# Altium PCB StrongPCB_v1.PcbDoc
Units mm, origin at the board's own origin, x right, y up, seen from the top; angles counter-clockwise.
Board outline 72.2 x 80 mm, 2 copper layers (Top Layer, Bottom Layer); 77 components, 52 nets, 371 pads, 27 vias.
Unrouted connection lines stored in the file: 130.
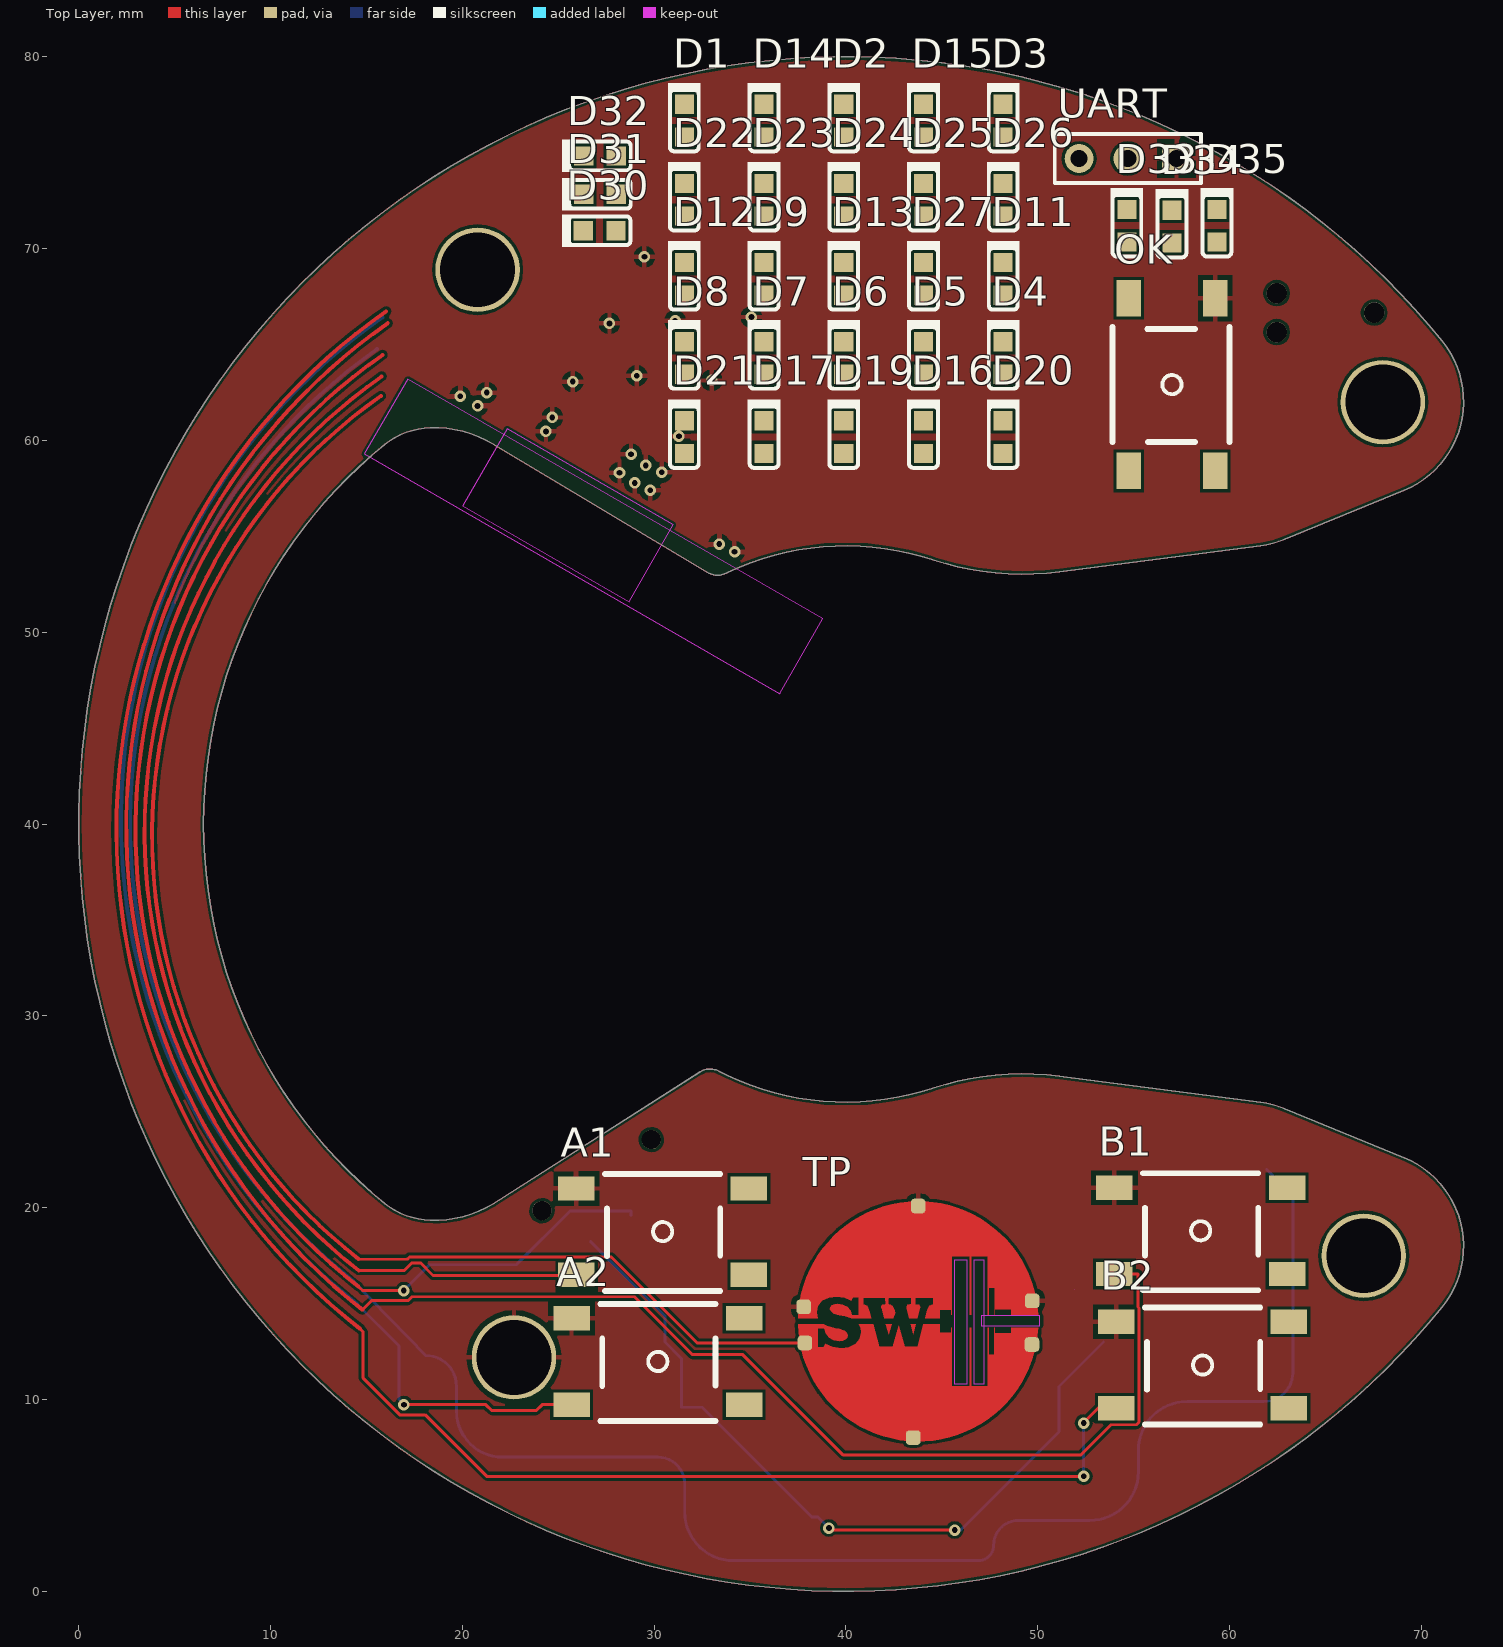
[diagram p0: Top Layer view]
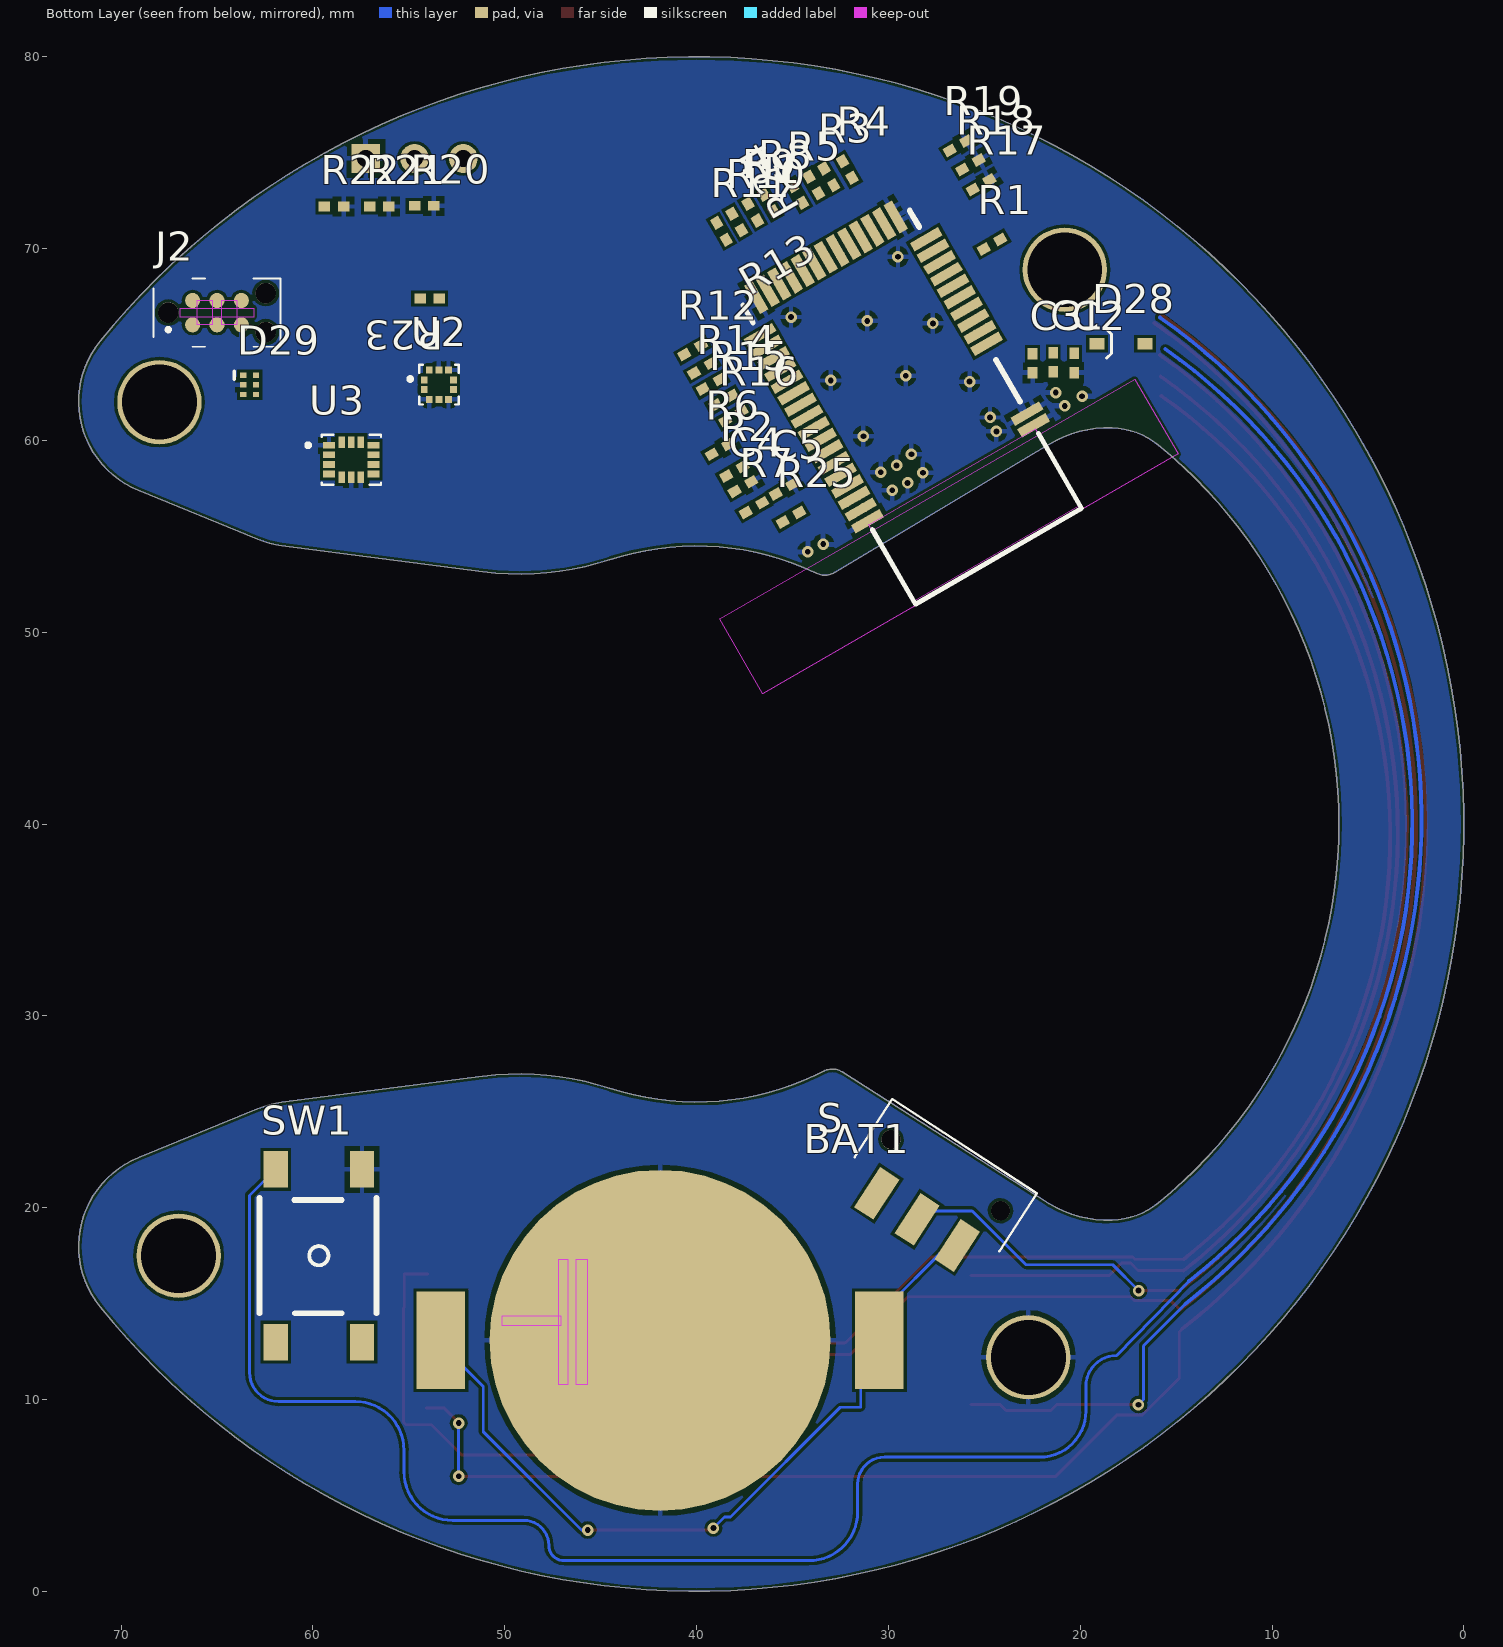
[diagram p1: Bottom Layer view, seen from below]

## Layer stack, top to bottom
Top Solder: solder mask 0.0102, Solder Resist, Dk 3.5
Top Layer: signal copper 0.0356
Dielectric 1: dielectric 0.32, FR-4, Dk 4.8
Bottom Layer: signal copper 0.0356
Bottom Solder: solder mask 0.0102, Solder Resist, Dk 3.5

## Board outline
18.342,19.348 ccw(c18.524,25.345) 21.607,20.198 32.409,27.089 cw(c32.923,26.231) 33.381,27.12 33.862,26.873 ccw(c40.006,40.006) 44.531,26.23 cw(c49.212,11.98) 51.139,26.855 61.619,25.498 cw(c60.977,20.54) 62.876,25.165 69.106,22.607 cw(c67.208,17.981) 71.093,14.835 cw(c40.006,40.006) 71.093,65.178 cw(c67.208,62.031) 69.106,57.406 62.876,54.848 cw(c60.977,59.473) 61.619,54.514 51.139,53.157 cw(c49.212,68.033) 44.531,53.782 ccw(c40.006,40.006) 33.862,53.14 33.757,53.086 cw(c33.3,53.975) 32.786,53.118 21.607,59.815 ccw(c18.524,54.668) 18.342,60.665 ccw(c18.463,56.667) 15.948,59.777 ccw(c31.938,40.006) 15.948,20.236 ccw(c18.463,23.346)

## Design rules (kind name [scope] priority, off if disabled: settings)
Clearance Clearance_1 [All] p1: gap=0.152 ignorepadtopadclearanceinfootprint=FALSE except(0: Arc-Hole Track-Hole SMDPad-Hole THPad-Hole Via-Hole Fill-Hole Poly-Hole Region-Hole Text-Hole)
Clearance [All] p2: gap=0.254 ignorepadtopadclearanceinfootprint=FALSE except(0: Arc-Hole Track-Hole SMDPad-Hole THPad-Hole Via-Hole Fill-Hole Poly-Hole Region-Hole Text-Hole)
HoleSize [All] p1: absolutevalues=TRUE maxlimit=6.2 minlimit=0.3 maxpercent=80.000 minpercent=20.000
MinimumAnnularRing [All] p1: minimumring=0.152
PolygonConnect [All] p1: connectstyle=Relief reliefconductorwidth=0.254 reliefentries=4 polygonreliefangle="90 Angle" airgapwidth=0.254
RoomDefinition StrongPCB_mixed [InComponentClass('StrongPCB_mixed')] p1: confinementstyle=ConfineIn formatcopy=TRUE lockcomponents=FALSE outline 74,2 203,2 203,32 74,32
RoutingCorners [All] p1: cornerstyle=45-Degree minsetback=0.152 maxsetback=0.152
RoutingVias [All] p1: holewidth=0.3 width=0.6 viastyle="Through Hole" minholewidth=0.3 minwidth=0.6 maxholewidth=0.3 maxwidth=0.6
SMDNeckDown [All] p1: percent=90.000
SolderMaskExpansion [All] p1: expansion=0.102
UnRoutedNet [All] p1: checkbadconnections=TRUE
Width [All] p1: maxlimit=0.254 minlimit=0.152 preferedwidth=0.153 minimp=50.000000 maximp=50.000000 favimp=50.000000
27 further rules are at their usual default settings.

## Classes and differential pairs
net class ROW[1..3]: ROW1 ROW2 ROW3
net class COL[1..9]: COL1 COL2 COL3 COL4 COL5 COL6 COL7 COL8 COL9

## Components (designator, comment, footprint, x,y, rotation, side; value= is the part's Value field where it differs from the comment)
A1 "SW_SPST_6MM" SW_FSM4JSMA#1 30.45,18.756 r90 top
A2 "SW_SPST_6MM" SW_FSM4JSMA#2 30.2,11.986 r90 top
B1 "SW_SPST_6MM" SW_FSM4JSMA#1 58.5,18.8 r90 top
B2 "SW_SPST_6MM" SW_FSM4JSMA#2 58.6,11.8 r90 top
BAT1 "BAT-HLD-001" BAT-HLD-001 41.9,13.089 r180 bottom
C1 "CAP_4U7_6V3_X5R_20%_0402" c_0402 21.406,64.077 r180 bottom
C2 "AP_4U7_6V3_X5R_20%_0402" c_0402 20.3,64.043 r180 bottom
C3 "1U_6V3" C_0402 22.486,64.033 r180 bottom
C4 "1U_6V3" C_0402 37.588,57.6 r60 bottom
C5 "CAP_100N_25V_0402_10%_X5R" C_0402 35.432,57.466 r60 bottom
D1 "LED_0603_RED" LED_0603_RED 31.581,76.675 r0 top
D2 "LED_0603_RED" LED_0603_RED 39.891,76.675 r0 top
D3 "LED_0603_RED" LED_0603_RED 48.2,76.675 r0 top
D4 "LED_0603_RED" LED_0603_RED 48.2,64.3 r0 top
D5 "LED_0603_RED" LED_0603_RED 44.045,64.3 r0 top
D6 "LED_0603_RED" LED_0603_RED 39.891,64.3 r0 top
D7 "LED_0603_RED" LED_0603_RED 35.736,64.3 r0 top
D8 "LED_0603_RED" LED_0603_RED 31.581,64.3 r0 top
D9 "LED_0603_RED" LED_0603_RED 35.736,68.425 r0 top
D11 "LED_0603_RED" LED_0603_RED 48.2,68.425 r0 top
D12 "LED_0603_RED" LED_0603_RED 31.581,68.425 r0 top
D13 "LED_0603_RED" LED_0603_RED 39.891,68.425 r0 top
D14 "LED_0603_RED" LED_0603_RED 35.736,76.675 r0 top
D15 "LED_0603_RED" LED_0603_RED 44.045,76.675 r0 top
D16 "LED_0603_RED" LED_0603_RED 44.045,60.175 r0 top
D17 "LED_0603_RED" LED_0603_RED 35.736,60.175 r0 top
D19 "LED_0603_RED" LED_0603_RED 39.891,60.175 r0 top
D20 "LED_0603_RED" LED_0603_RED 48.2,60.175 r0 top
D21 "LED_0603_RED" LED_0603_RED 31.581,60.175 r0 top
D22 "LED_0603_RED" LED_0603_RED 31.581,72.55 r0 top
D23 "LED_0603_RED" LED_0603_RED 35.736,72.55 r0 top
D24 "LED_0603_RED" LED_0603_RED 39.891,72.55 r0 top
D25 "LED_0603_RED" LED_0603_RED 44.045,72.55 r0 top
D26 "LED_0603_RED" LED_0603_RED 48.2,72.55 r0 top
D27 "LED_0603_RED" LED_0603_RED 44.045,68.425 r0 top
D28 "D_BAT43WS-7-F" SOD323 17.872,65.04 r90 bottom
D29 "D_ESD_PRTR5V0U2F_115" SOT886 63.3,62.905 r180 bottom
D30 "LED_0603_RED_100KG" LED_0603_RED 27.163,70.935 r90 top
D31 "LED_0603_RED_200KG" LED_0603_RED 27.183,72.835 r90 top
D32 "LED_0603_RED_300KG" LED_0603_RED 27.183,74.835 r90 top
D33 "LED_0603_RED_ID" LED_0603_RED 54.652,71.198 r0 top
D34 "LED_0603_RED_KG" LED_0603_RED 57,71.15 r0 top
D35 "LED_0603_RED_RPS" LED_0603_RED 59.348,71.198 r0 top
J2 "Sockets & Adapters J-Link 6-pin Needle Adapter   Source:  Datasheet" "J-Link 6-pin Needle Adapter no legs" 67.54,66.665 r180 bottom
OK "SW_SPST_6MM" SW_FSM4JSMA#2 57,62.913 r0 top
R1 "R_1K_0402_5%" R_0402 24.6,70.236 r240 bottom
R2 "R_1K_0402_5%" R_0402 38.021,58.4 r60 bottom
R3 "R_1K_0402_5%" R_0402 33.1,73.746 r150 bottom
R4 "R_1K_0402_5%" R_0402 32.137,74.121 r150 bottom
R5 "R_10M_0402_5%" R_0402 34.736,72.831 r150 bottom
R6 "R_12K_0402_1%" R_0402 38.777,59.533 r60 bottom
R7 "R_10K_0402_5%" R_0402 37,56.502 r60 bottom
R8 "R_220R_0402_1%" R_0402 36.232,72.377 r150 bottom
R9 "R_220R_0402_1%" R_0402 37.076,71.9 r150 bottom
R10 "R_220R_0402_1%" R_0402 37.9,71.396 r150 bottom
R11 "R_220R_0402_1%" R_0402 38.7,70.908 r150 bottom
R12 "R_220R_0402_1%" R_0402 40.2,64.724 r60 bottom
R13 "R_220R_0402_1%" R_0402 39.7,63.776 r60 bottom
R14 "R_220R_0402_1%" R_0402 39.233,62.925 r60 bottom
R15 "R_220R_0402_1%" R_0402 38.6,62.1 r60 bottom
R16 "R_220R_0402_1%" R_0402 38.069,61.276 r60 bottom
R17 "R_220R_0402_1%" R_0402 25.162,73.337 r240 bottom
R18 "R_220R_0402_1%" R_0402 25.711,74.371 r240 bottom
R19 "R_220R_0402_1%" R_0402 26.372,75.371 r240 bottom
R20 "R_220R_0402_1%" R_0402 54.2,72.229 r270 bottom
R21 "R_220R_0402_1%" R_0402 56.539,72.2 r270 bottom
R22 "R_220R_0402_1%" R_0402 58.9,72.2 r270 bottom
R23 "R_1K_0402_5%" R_0402 53.912,67.4 r270 bottom
R24 "R_1K_0402_5%" R_0402 33.887,73.313 r150 bottom
R25 "R_1K_0402_5%" R_0402 35.076,56 r60 bottom
S "JS102011SAQN" SW_JS102011SAQN 27.008,21.7 r33 bottom
SW1 "SW_SPST_6MM" SW_FSM4JSMA#3 59.693,17.5 r180 bottom
TP "Component_1" PCBComponent_1 35.895,7.888 r0 top
U1 "IC_nRF51822_MODULE" IC_nRF51822_MODULE_PASTE 29,62.6 r330 bottom
U2 "BMP388" PQFN50P200X200X80-10N 53.43,62.907 r180 bottom
U3 "LSM6DSLTR" PQFN50P300X250X86-14N 58,59 r180 bottom
UART "Header 3" HDR1X3 57.24,74.7 r180 top

## Footprints (in the part's own frame and the unit in brackets; to place one, negate y for a bottom-side part, rotate by r counter-clockwise, add the part's x,y. Pads: shape width x height; smd on the part's side, far side on the other; paste and mask are expansions set on the pad)
BAT-HLD-001 [mil]
  rect 100x200 smd: +@1(-450,0) +@2(450,0)
  round 700 smd: NEG(0,0)
c_0402 [mm]
  rect 0.5x0.6 smd: 1(0,0.5) 2(0,-0.5)
  body extent -0.26,-0.5 0.27,0.5, height 0.36
C_0402 [mm]
  rect 0.5x0.6 smd: 1(0,0.5) 2(0,-0.5)
  body extent -0.26,-0.5 0.27,0.5, height 0.36
HDR1X3 [mm] "Connector; Header; 3 Position"
  rect 1.5x1.5 hole 0.9: 1(0,0)
  round 1.5 hole 0.9: 2(2.54,0) 3(5.08,0)
  silkscreen extent -1.27,-1.27 6.35,1.27
IC_nRF51822_MODULE_PASTE [mm]
  round 0.5 smd: 1(-5.291,4.849) 1(-4.591,4.849) 2(-5.291,4.149) 2(-4.591,4.149) 3(-5.291,-0.051) 3(-4.591,-0.051) 4(-5.291,-0.751) 4(-4.591,-0.751) 5(-5.291,-1.451) 5(-4.591,-1.451) 6(-5.291,-2.151) 6(-4.591,-2.151) 7(-5.291,-2.851) 7(-4.591,-2.851) 8(-5.291,-3.551) 8(-4.591,-3.551) 9(-5.291,-4.251) 9(-4.591,-4.251) 10(-5.291,-4.951) 10(-4.591,-4.951) 11(-5.291,-5.651) 11(-4.591,-5.651) 12(-5.291,-6.351) 12(-4.591,-6.351) 13(-3.991,-8.651) 13(-3.991,-7.851) 14(-3.291,-8.651) 14(-3.291,-7.851) 15(-2.591,-8.651) 15(-2.591,-7.851) 16(-1.891,-8.651) 16(-1.891,-7.851) 17(-1.191,-8.651) 17(-1.191,-7.851) 18(-0.491,-8.651) 18(-0.491,-7.851) 19(0.209,-8.651) 19(0.209,-7.851) 20(0.909,-8.651) 20(0.909,-7.851) 21(1.609,-8.651) 21(1.609,-7.851) 22(2.309,-8.651) 22(2.309,-7.851) 23(3.009,-8.651) 23(3.009,-7.851) 24(3.709,-8.651) 24(3.709,-7.851) 25(4.409,-8.651) 25(4.409,-7.851) 26(5.009,-6.351) 26(5.709,-6.351) 27(5.009,-5.651) 27(5.709,-5.651) 28(5.009,-4.951) 28(5.709,-4.951) 29(5.009,-4.251) 29(5.709,-4.251) 30(5.009,-3.551) 30(5.709,-3.551) 31(5.009,-2.851) 31(5.709,-2.851) 32(5.009,-2.151) 32(5.709,-2.151) 33(5.009,-1.451) 33(5.709,-1.451) 34(5.009,-0.751) 34(5.709,-0.751) 35(5.009,-0.051) 35(5.709,-0.051) 36(5.009,0.649) 36(5.709,0.649) 37(5.009,1.349) 37(5.709,1.349) 38(5.009,2.049) 38(5.709,2.049) 39(5.009,2.749) 39(5.709,2.749) 40(5.009,3.449) 40(5.709,3.449) 41(5.009,4.149) 41(5.709,4.149) 42(5.009,4.849) 42(5.709,4.849)
  rect 1.7x0.5 smd: 1(-4.791,4.849) 2(-4.791,4.149) 3(-4.791,-0.051) 4(-4.791,-0.751) 5(-4.791,-1.451) 6(-4.791,-2.151) 7(-4.791,-2.851) 8(-4.791,-3.551) 9(-4.791,-4.251) 10(-4.791,-4.951) 11(-4.791,-5.651) 12(-4.791,-6.351) 26(5.209,-6.351) 27(5.209,-5.651) 28(5.209,-4.951) 29(5.209,-4.251) 30(5.209,-3.551) 31(5.209,-2.851) 32(5.209,-2.151) 33(5.209,-1.451) 34(5.209,-0.751) 35(5.209,-0.051) 36(5.209,0.649) 37(5.209,1.349) 38(5.209,2.049) 39(5.209,2.749) 40(5.209,3.449) 41(5.209,4.149) 42(5.209,4.849)
  rect 0.5x1.7 smd: 13(-3.991,-8.151) 14(-3.291,-8.151) 15(-2.591,-8.151) 16(-1.891,-8.151) 17(-1.191,-8.151) 18(-0.491,-8.151) 19(0.209,-8.151) 20(0.909,-8.151) 21(1.609,-8.151) 22(2.309,-8.151) 23(3.009,-8.151) 24(3.709,-8.151) 25(4.409,-8.151)
  silkscreen extent -4.79,-8.15 5.21,9.85, body extent -4.89,-8.18 5.11,9.82, height 3.2
"J-Link 6-pin Needle Adapter no legs" [mil]
  rrect100% 30.98x30.98 smd: 1(50,-25) 2(50,25) 3(100,-25) 4(100,25) 5(150,-25) 6(150,25)
  round 42.01 hole 42.01 unplated: MH5(0,0) MH6(200,40) MH7(200,-40)
  Top Layer keep-out region: 109.5,25 140.5,25 140.5,-25 109.5,-25
  Top Layer keep-out region: 59.5,25 90.5,25 90.5,-25 59.5,-25
  Top Layer keep-out region: 25,9.5 175,9.5 175,-9.5 25,-9.5
  silkscreen extent -30,-70 230,70
LED_0603_RED [mm]
  round 0.152 on Top Overlay: 0(0,0)
  rect 1x1 smd paste+0 mask+0: A(0,-0.85) K(0,0.85)
  silkscreen extent -0.85,-1.6 0.85,1.97, body extent -0.43,-0.84 0.37,0.78, height 1.1
PCBComponent_1 [mil]
  rrect50% 30x30 smd: 1(75,273.57) 1(310,480.46) 1(544.09,285.65) 2(77.61,199.31) 2(300,5.02) 2(543.7,196.19)
  Top Layer region: 103.81,190.41 115.85,190.42 119.83,197.68 134.19,191.2 151.96,188.78 167.8,190.63 182.08,197.58 190.5,208.05 193.19,221.23 192.03,230.11 188.15,237.92 217.72,237.92 230.49,191.82 258.12,191.84 270.26,234.2 282.19,191.86 308.73,191.88 320.86,237.92 354.84,237.92 354.84,220.21 377.46,220.21 377.46,230.75 379.39,230.75 379.39,110.96 416,110.96 416,230.75 419.48,230.75 419.48,110.96 452.62,110.96 452.62,230.75 454.71,230.75 454.71,174.93 466.52,174.93 466.52,230.75 467.31,230.75 467.31,219.01 501.05,219.01 501.05,230.75 556.44,230.75 518.61,112 427.55,26.9 306.51,-2.83 186.39,30.4 97.85,118.12 63.49,237.92 63.49,237.92 116.24,237.92 122.16,235.09 143.73,229.02 148.16,228.01 159.45,224.42 163.31,220.53 166.01,215.26 164.78,210.27 161.23,206.56 154.88,203.99 148.03,203.35 137.04,205.03 127.36,210.48 120.46,219.06 117.12,229.58 103.78,229.57
  Top Layer region: 158 vertices and 0 holes, not listed, extent 63.76,250 556.16,490.23
  Top Layer region: 299.79,216.96 294.55,237.92 305.29,237.92
  Top Layer region: 243.79,237.92 255.94,237.92 249.47,216.92
  Keep-Out Layer region: 545,235
  Keep-Out Layer region: 560,235 560,255 440,255 440,235
  Keep-Out Layer region: 385,370 410,370 410,115 385,115
  Keep-Out Layer region: 425,370 445,370 445,115 425,115
  Keep-Out Layer region: 630,310
PQFN50P200X200X80-10N [mm]
  rrect9% 0.35x0.38 smd: 1(-0.765,0.25) 2(-0.765,-0.25) 3(-0.5,-0.765) 4(0,-0.765) 5(0.5,-0.765) 6(0.765,-0.25) 7(0.765,0.25) 8(0.5,0.765) 9(0,0.765) 10(-0.5,0.765)
  silkscreen extent -1.6,-1.03 1.03,1.03
PQFN50P300X250X86-14N [mm]
  rect 0.61x0.35 smd: 1(-1.16,0.75) 2(-1.16,0.25) 3(-1.16,-0.25) 4(-1.16,-0.75) 8(1.16,-0.75) 9(1.16,-0.25) 10(1.16,0.25) 11(1.16,0.75)
  rect 0.35x0.61 smd: 5(-0.5,-0.91) 6(0,-0.91) 7(0.5,-0.91) 12(0.5,0.91) 13(0,0.91) 14(-0.5,0.91)
  silkscreen extent -2.35,-1.3 1.55,1.3
R_0402 [mm]
  rect 0.5x0.6 smd: 1(0,0.5) 2(0,-0.5)
  body extent -0.25,-0.47 0.25,0.53, height 0.35
SOD323 [mm]
  rect 0.6x0.8 smd: 1(0,1.25) 2(0,-1.25)
  silkscreen extent -0.75,0.5 0.75,0.75, body extent -0.68,-1.3 0.67,1.3, height 1.1
SOT886 [mm]
  rect 0.325x0.27 smd: 1(-0.338,0.5) 2(-0.338,0) 3(-0.338,-0.5) 4(0.338,-0.5) 5(0.338,0) 6(0.338,0.5)
  silkscreen extent -0.8,0.3 -0.8,0.7, body extent -0.5,-0.75 0.5,0.75, height 0.82
SW_FSM4JSMA#1 [mm]
  rect 1.27x1.905 smd: 1(-2.25,4.5) 2(2.25,4.5) 3(2.25,-4.5) 4(-2.25,-4.5)
  round 0.152 on Top Overlay: 3(0,0)
  silkscreen extent -3.1,-3 3,3, body extent -3,-5 3,5, height 5.1
SW_FSM4JSMA#2 [mm]
  rect 1.27x1.905 smd: 1(-2.25,4.5) 2(2.25,4.5) 3(2.25,-4.5) 4(-2.25,-4.5)
  round 0.152 on Top Overlay: 3_1(0,0)
  silkscreen extent -3.1,-3 3,3, body extent -3,-5 3,5, height 5.1
SW_FSM4JSMA#3 [mm]
  rect 1.27x1.905 smd: 1(-2.25,4.5) 2(2.25,4.5) 3(2.25,-4.5) 4(-2.25,-4.5)
  round 0.152 on Bottom Overlay: 3(0,0)
  silkscreen extent -3.1,-3 3,3, body extent -3,-5 3,5, height 5.1
SW_JS102011SAQN [mm]
  rect 1.2x2.5 smd: 1(-2.5,2.75) 2(0,2.75) 3(2.5,2.75)
  round 1 hole 1 unplated: ""(-3.4,0) ""(3.4,0)
  silkscreen extent -4.5,-1.8 4.5,1.8

## Part data
A1 A2 B1 B2 OK SW1: "SPST SWITCH 6MM", MANUFACTURER="TE CONNECTIVITY / ALCOSWITCH", FARNELL=3801305, PART=FSM4JSMA
BAT1: "Battery Retainer Coin, 20.0mm 1 Cell SMD _SMT_ Tab", Package=None, Digi-Key_Part_Number=BAT-HLD-001-TRCT-ND, Digi-Key_Purchase_URL=https://www.digikey.com/product-detail/en/linx-technologies-inc/BAT-HLD-001-TR/BAT-HLD-001-TRCT-ND/5803803?utm_source=snapeda&utm_medium=aggregator&utm_campaign=symbol, MF="Linx Technologies", MP=BAT-HLD-001, SnapEDA_Link=https://www.snapeda.com/parts/BAT-HLD-001/Linx%20Technologies%20Inc./view-part/184402/?ref=snap
C1: MANUFACTURER=TDK, FARNELL=1962109, PART=C1005X5R0J475M
C2: library part CAP_4U7_6V3_X5R_20%_0402, "CAP_4U7_6V3_X5R_20%_0402", MANUFACTURER=TDK, FARNELL=1962109, PART=C1005X5R0J475M
C3 C4: library part CAP_1u_6V3_0402_10%_X6S, "CAP_1u_6V3_0402_10%_X6S", MANUFACTURER=YAGEO, DIGIKEY=311-1338-6-ND, FARNELL=9402047RL, MOUSER=603-CC402KRX7R7BB104, PART=CC0402KRX7R7BB104
C5: MANUFACTURER="TAIYO YUDEN", FARNELL=1611916, PART=TMK105BJ104KV-F
D1 D2 D3 D4 D5 D6 D7 D8 D9 D11 D12 D13 D14 D15 D16 D17 D19 D20 D21 D22 D23 D24 D25 D26 D27: "LED RED 0603", MANUFACTURER=KINGBRIGHT, FARNELL=8529868RL, PART=KP-1608SURC
D28: "Schottky 200mA 30V 0.5uA@25Vr", MANUFACTURER="Diodes Incorporated", DIGIKEY=BAT43WS-FDICT-ND, FARNELL=2305998, MOUSER=621-BAT43WS-F, PART=BAT43WS-7-F, RS=751-3364P
D29: "Ultra low capacitance double rail-to-rail ESD protection", MANUFACTURER=NXP, FARNELL=2459738, PART=PRTR5V0U2F_115
D30 D31 D32 D33 D34 D35: library part LED_0603_RED, "LED RED 0603", MANUFACTURER=KINGBRIGHT, FARNELL=8529868RL, PART=KP-1608SURC
J2: library part "J-Link Connector", Manufacturer_Name="Segger Microcontroller", Manufacturer_Part_Number=8.06.16, Package=80616, DeviceSetName=8.06.16, GateName_1=G$1, Height=1mm, LibraryName=8.06.16, Mouser_Part_Number=943-8.06.16, Mouser_Price-Stock=https://www.mouser.com/Search/Refine.aspx?Keyword=943-8.06.16, SymbolName_1=8.06.16
R5: MANUFACTURER=YAGEO, FARNELL=9238964RL, PART=RC0603FR-0710ML
S: "Slide Switch SPDT Surface Mount, Right Angle", Package=None, Availability=Unavailable, MF=C&K, MP=JS102011SAQN, Price=None, SnapEDA_Link=https://www.snapeda.com/parts/JS102011SAQN/C%26K/view-part/214325/?ref=snap
U1: "RF System on a Chip - SoC 2.4GHz BT low Energy 256KB Flash 16KB Ram", MANUFACTURER=RAYTAC, FARNELL=???, PART=MDBT40-256V3
U2: "Pressure Sensor 4.35PSI ~ 18.13PSI _30kPa ~ 125kPa_ Absolute 10-WFLGA", Package="WFLGA-10 Bosch Tools", Digi-Key_Part_Number=828-1079-1-ND, Digi-Key_Purchase_URL=https://www.digikey.com/product-detail/en/bosch-sensortec/BMP388/828-1079-1-ND/8322640?utm_source=snapeda&utm_medium=aggregator&utm_campaign=symbol, MF="Bosch Sensortec", MP=BMP388, SnapEDA_Link=https://www.snapeda.com/parts/BMP388/Bosch%20Sensortec/view-part/2747857/?ref=snap
U3: "Accelerometer, Gyroscope, Temperature, 6 Axis Sensor I²C, SPI Output", Package="LGA-14 STMicroelectronics", Availability=Unavailable, MF=STMicroelectronics, MP=LSM6DSLTR, Price=None, SnapEDA_Link=https://www.snapeda.com/parts/LSM6DSLTR/STMicroelectronics/view-part/550517/?ref=snap
UART: "Header, 3-Pin", LatestRevisionDate=17-Jul-2002, LatestRevisionNote="Re-released for DXP Platform.", Publisher="Altium Limited"
R1 R2 R3 R4 R23 R24 R25: FARNELL=1358043
R6: FARNELL=2447104RL, FARNELL_ROHS=2447104RL
R7: FARNELL=1358069

## Free pads (board coordinates)
  round 4.4 hole 3.9: 3(20.8,68.9) 3(22.7,12.2) 3(67,17.5) 3(68,62)

## Via types
v1: diameter 0.6, hole 0.3, Top Layer to Bottom Layer, tented both sides, 27 vias

## Nets (pads, with @x,y where several pads share a name; then routed paths per layer and width w, separated by ;. In a path a pad name is that pad's centre, name@x,y a point inside that pad or via, vN(x,y) a via of type N, cw(c..) or ccw(c..) an arc to the next point about the centre after c; other vN are vias at no path point)
ACC_INT1: U1.11 U3.4
ACC_INT2: U1.10 U3.9
BTN_A: A1.1 R2.2 U1.37 | length 65.7
  Top Layer w0.153: 14.604,16.728 16.98,16.728 17.381,17.129 17.819,17.129 18.483,16.465 A1.1@25.7,16.465
  Top Layer w0.2: 14.604,16.728 cw(c32.444,39.591) 15.8,63.34
BTN_B: B1.1 R1.2 U1.9 | length 113.6
  Top Layer w0.153: 14.801,14.683 15.274,15.156 17.175,15.156 17.38,15.36 28.981,15.36 32.001,12.341 34.628,12.341 39.868,7.101 52.233,7.101 53.818,8.686 55.147,8.686 55.281,8.82 55.281,14.78 55.237,14.824 55.237,16.55 B1.1
  Top Layer w0.2: 14.801,14.683 cw(c34.487,39.911) 16.121,66.117
COL1: R8.2 U1.21
COL2: R9.2 U1.22
COL3: R10.2 U1.23
COL4: R11.2 U1.24
COL5: R12.2 U1.26
COL6: R13.2 U1.27
COL7: R14.2 U1.28
COL8: R15.2 U1.29
COL9: R16.2 U1.30
COLR1: D1.K D11.K D19.K R8.1
COLR2: D2.K D12.K D20.K R9.1
COLR3: D3.K D13.K D21.K R10.1
COLR4: D4.K D14.K D22.K R11.1
COLR5: D5.K D15.K D23.K R12.1
COLR6: D6.K D16.K D24.K R13.1
COLR7: D7.K D17.K D25.K R14.1
COLR8: D8.K D26.K R15.1
COLR9: D9.K D27.K R16.1
GND: A1.2 A2.2 B1.2 B2.2 BAT1.NEG C1.2 C2.2 C3.2 C4.2 C5.2 D29.2 J2.5 OK.2 pad.3@22.7,12.2 R6.2 R17.1 R18.1 R19.1 R20.1 R21.1 R22.1 SW1.2 TP.1 U1.1 U1.2 U1.13 U1.25 U1.42 U2.3 U2.5 U2.8 U2.9 U3.1 U3.6 U3.7 UART.1
  other v1: 34.197,54.2 33.4,54.6 29.8,57.4 29,57.787 28.2,58.321 30.4,58.34 29.573,58.7 28.8,59.281 31.3,60.218 24.367,60.474 24.7,61.2 20.8,61.804 19.9,62.312 21.273,62.5 25.766,63.071 33,63.129 29.1,63.372 27.677,66.104 31.1,66.235 35.076,66.435 29.5,69.573
MAG_INT1: U1.12 U2.7
MISO: D31.A U1.5
MOSI: D32.A U1.4
NetBAT1_+@1: BAT1.+@1 BAT1.+@2 S.1 | length 40.8
  Top Layer w0.153: v1(39.118,3.3) 39.042,3.3 39.142,3.2 45.674,3.2 v1(45.676,3.198)
  Bottom Layer w0.153: S.1@26.701,18.232 30.57,14.363 30.57,13 31.438,12.132 31.438,9.6 32.505,9.6 38.223,3.882 38.537,3.882 v1(39.118,3.3) ; v1(45.676,3.198) 45.991,3.198 51.119,8.325 51.119,10.689 53.43,13
NetD28_2: D28.2 S.2 | length 72.7
  Top Layer w0.153: 14.6,15.883 14.799,15.684 v1(16.957,15.684)
  Top Layer w0.2: 14.6,15.883 cw(c33.192,39.711) 15.847,64.462
  Bottom Layer w0.153: v1(16.957,15.684) 18.3,17.028 22.823,17.028 25.631,19.836 28.798,19.836 S.2@28.798,19.594
NetD30_K: D30.K R17.2
NetD31_K: D31.K R18.2
NetD32_K: D32.K R19.2
NetD33_K: D33.K R20.2
NetD34_K: D34.K R21.2
NetD35_K: D35.K R22.2
P0: R5.2 TP.2 U1.20 | length 77.5
  Top Layer w0.153: 14.61,17.316 17.137,17.316 17.255,17.434 27.77,17.434 32.253,12.951 TP.2@37.866,12.951 ; TP.2@43.515,7.999 TP.2@43.515,8.016
  Top Layer w0.2: 14.61,17.316 cw(c31.834,39.391) 15.764,62.321
P0.16: D35.A U1.34
P0.18: OK.1 R23.2 U1.38
P0.20: A2.1 R25.2 U1.40 | length 75
  Top Layer w0.153: v1(16.964,9.736) 21.232,9.736 21.548,9.419 23.852,9.419 24.168,9.736 A2.1
  Bottom Layer w0.153: 14.521,14.983 16.7,12.804 16.7,10 v1(16.964,9.736)
  Bottom Layer w0.2: 14.521,14.983 cw(c34.207,40.211) 15.841,66.417
P1: B2.1 D33.A R24.2 U1.19 | length 108.8
  Top Layer w0.153: 14.673,13.694 14.837,13.53 14.837,11.115 16.745,9.207 18.071,9.207 21.278,6 v1(52.4,6) ; v1(52.4,8.774) 52.4,8.8 53.15,9.55 B2.1
  Top Layer w0.2: 14.673,13.694 cw(c34.973,39.711) 16.034,66.736
  Bottom Layer w0.153: v1(52.4,6) v1(52.4,8.774)
P2: D34.A U1.18
ROW1: D1.A D2.A D3.A D4.A D5.A D6.A D7.A D8.A D9.A U1.31
ROW2: D11.A D12.A D13.A D14.A D15.A D16.A D17.A U1.32
ROW3: D19.A D20.A D21.A D22.A D23.A D24.A D25.A D26.A D27.A U1.33
SCK: D30.A U1.6
SCL: R3.2 U1.17 U2.2 U3.13
SDA: R4.2 U1.16 U2.4 U3.14
SWCLK: D29.3 D29.4 J2.4 R6.1 U1.36
SWDIO_RST: D29.1 D29.6 J2.2 J2.3 U1.35
TGT_NRST: C5.1 R7.2 SW1.1 U1.39 | length 131.6
  Bottom Layer w0.153: 14.32,16.183 18.1,12.3 cw(c18.1,10.7) 19.7,10.7 19.7,9.4 ccw(c22.1,9.4) 22.1,7 30.2,7 cw(c30.2,5.6) 31.6,5.6 31.6,4.14 ccw(c34.14,4.14) 34.14,1.6 46.9,1.6 ccw(c46.9,2.4) 47.7,2.4 cw(c49,2.4) 49,3.7 52.713,3.7 ccw(c52.713,6.24) 55.253,6.24 55.253,7.36 cw(c57.793,7.36) 57.793,9.9 61.8,9.9 ccw(c61.8,11.4) 63.3,11.4 63.3,20.643 SW1.1
  Bottom Layer w0.2: 14.32,16.183 cw(c32.912,40.011) 15.566,64.762
TGT_RXD: U1.8
TGT_TXD: U1.7 UART.2 UART.3
V3.3: C1.1 C2.1 C3.1 C4.1 D28.1 D29.5 J2.1 R1.1 R2.1 R3.1 R4.1 R5.1 R7.1 R23.1 R24.1 R25.1 U1.3 U1.14 U2.1 U2.6 U2.10 U3.5 U3.8 U3.12
pads on no net: A1.3 A1.4 A2.3 A2.3_1 A2.4 B1.3 B1.4 B2.3 B2.3_1 B2.4 D1.0 D2.0 D3.0 D4.0 D5.0 D6.0 D7.0 D8.0 D9.0 D11.0 D12.0 D13.0 D14.0 D15.0 D16.0 D17.0 D19.0 D20.0 D21.0 D22.0 D23.0 D24.0 D25.0 D26.0 D27.0 D30.0 D31.0 D32.0 D33.0 D34.0 D35.0 J2.6 J2.MH5 J2.MH6 J2.MH7 OK.3 OK.3_1 OK.4 S. S.3 SW1.3 SW1.4 U1.15 U1.41 U3.2 U3.3 U3.10 U3.11

## Polygon pours and split planes (outlines as drawn)
GND on Bottom Layer "GND_L02_P003" (solid, pour order 3): 18.342,19.348 ccw(c18.524,25.345) 21.607,20.198 32.409,27.089 cw(c32.923,26.231) 33.381,27.12 33.862,26.873 ccw(c40.006,40.006) 44.531,26.23 cw(c49.212,11.98) 51.139,26.855 61.619,25.498 cw(c60.977,20.54) 62.876,25.165 69.106,22.607 cw(c67.208,17.981) 71.093,14.835 cw(c40.006,40.006) 71.093,65.178 cw(c67.208,62.031) 69.106,57.406 62.876,54.848 cw(c60.977,59.473) 61.619,54.514 51.139,53.157 cw(c49.212,68.033) 44.531,53.782 ccw(c40.006,40.006) 33.862,53.14 33.757,53.086 cw(c33.3,53.975) 32.786,53.118 21.607,59.815 ccw(c18.524,54.668) 18.342,60.665 ccw(c18.463,56.667) 15.948,59.777 ccw(c31.938,40.006) 15.948,20.236 ccw(c18.463,23.346)
GND on Top Layer "GND_L01_P001" (solid, pour order 1): 18.342,19.348 ccw(c18.524,25.345) 21.607,20.198 32.409,27.089 cw(c32.923,26.231) 33.381,27.12 33.862,26.873 ccw(c40.006,40.006) 44.531,26.23 cw(c49.212,11.98) 51.139,26.855 61.619,25.498 cw(c60.977,20.54) 62.876,25.165 69.106,22.607 cw(c67.208,17.981) 71.093,14.835 cw(c40.006,40.006) 71.093,65.178 cw(c67.208,62.031) 69.106,57.406 62.876,54.848 cw(c60.977,59.473) 61.619,54.514 51.139,53.157 cw(c49.212,68.033) 44.531,53.782 ccw(c40.006,40.006) 33.862,53.14 33.757,53.086 cw(c33.3,53.975) 32.786,53.118 21.607,59.815 ccw(c18.524,54.668) 18.342,60.665 ccw(c18.463,56.667) 15.948,59.777 ccw(c31.938,40.006) 15.948,20.236 ccw(c18.463,23.346)

## Keep-outs
Keep-Out Layer:
  region: 22.345,60.607 20.033,56.604 28.7,51.6 31.011,55.603
  region: 17.15,63.197 14.9,59.3 36.551,46.8 38.801,50.697

## Other copper
Multi-Layer:
  the board outline again, w0.013

## Silkscreen, mask and mechanical layers (free items; w line width, h text height)
Mechanical 1:
  the board outline again, w0.2